# Altium PCB OBD.PcbDoc
Units mil, origin at the board's own origin, x right, y up, seen from the top; angles counter-clockwise.
Board outline 6000 x 4000 mil, 2 copper layers (Top Layer, Bottom Layer); 12 components, 0 nets, 112 pads, 6 vias.
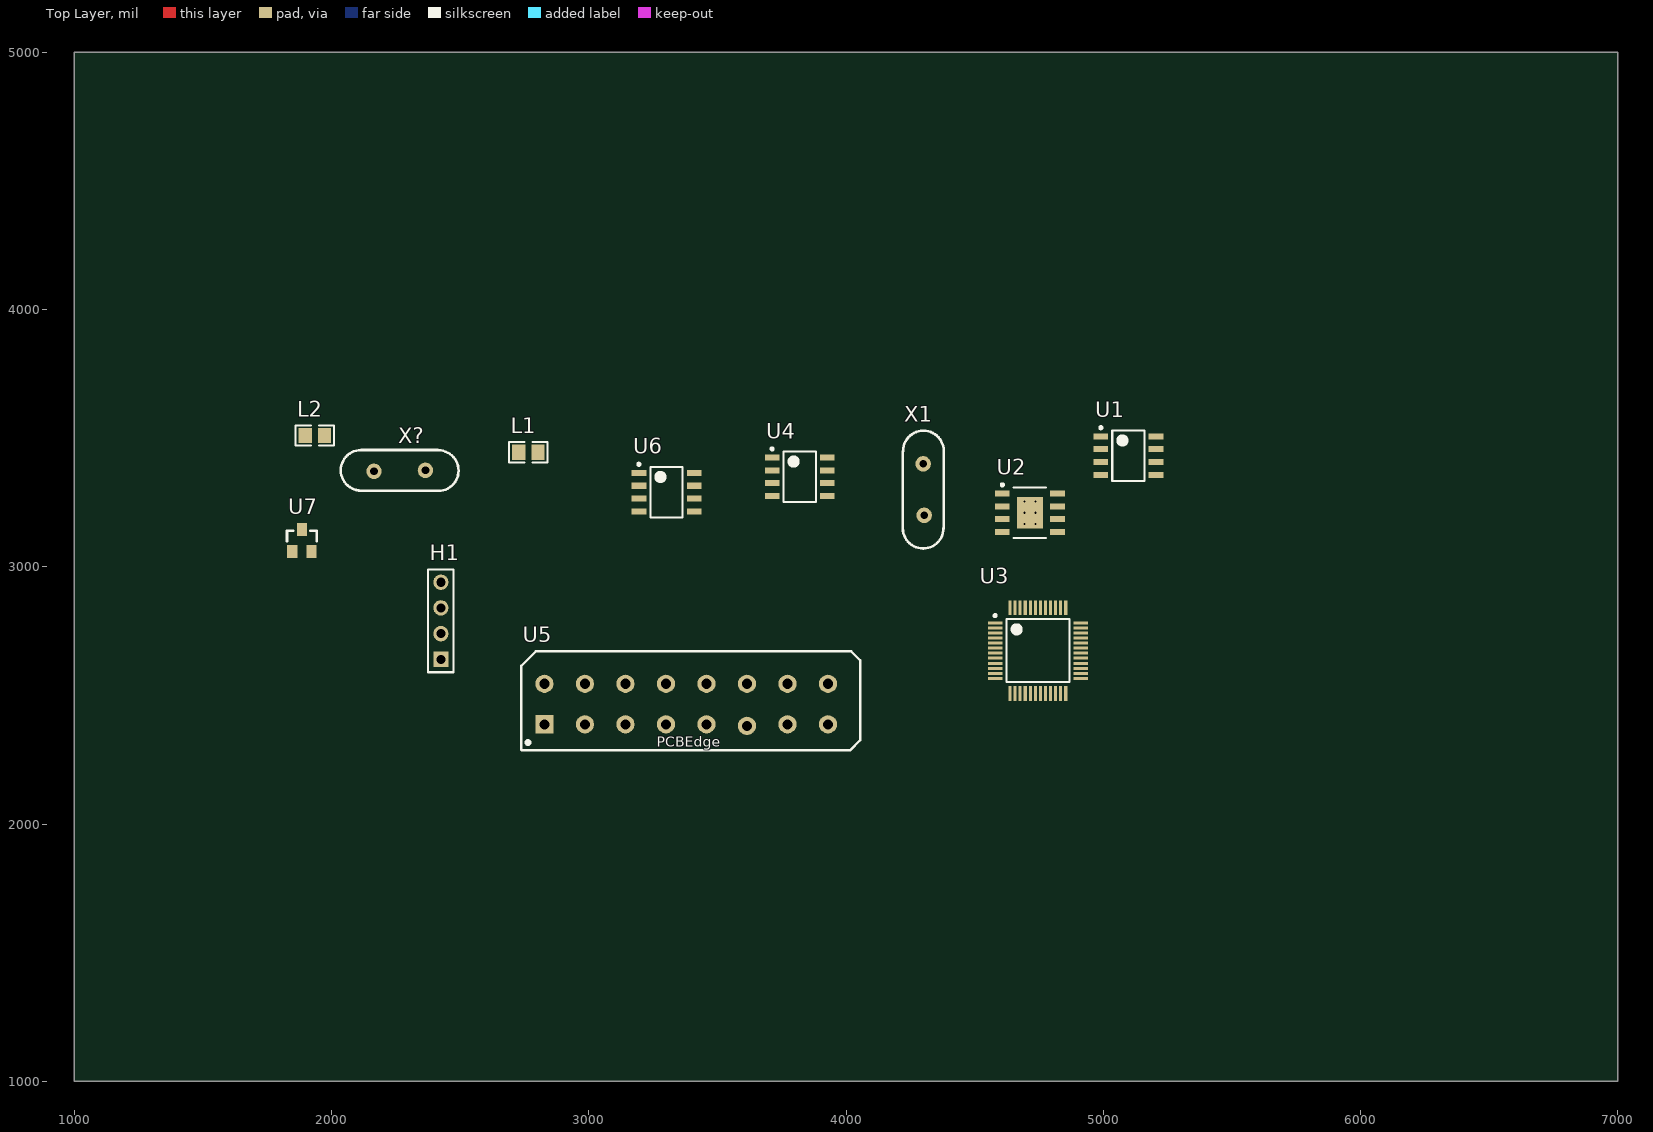
[diagram p0: Top Layer view]
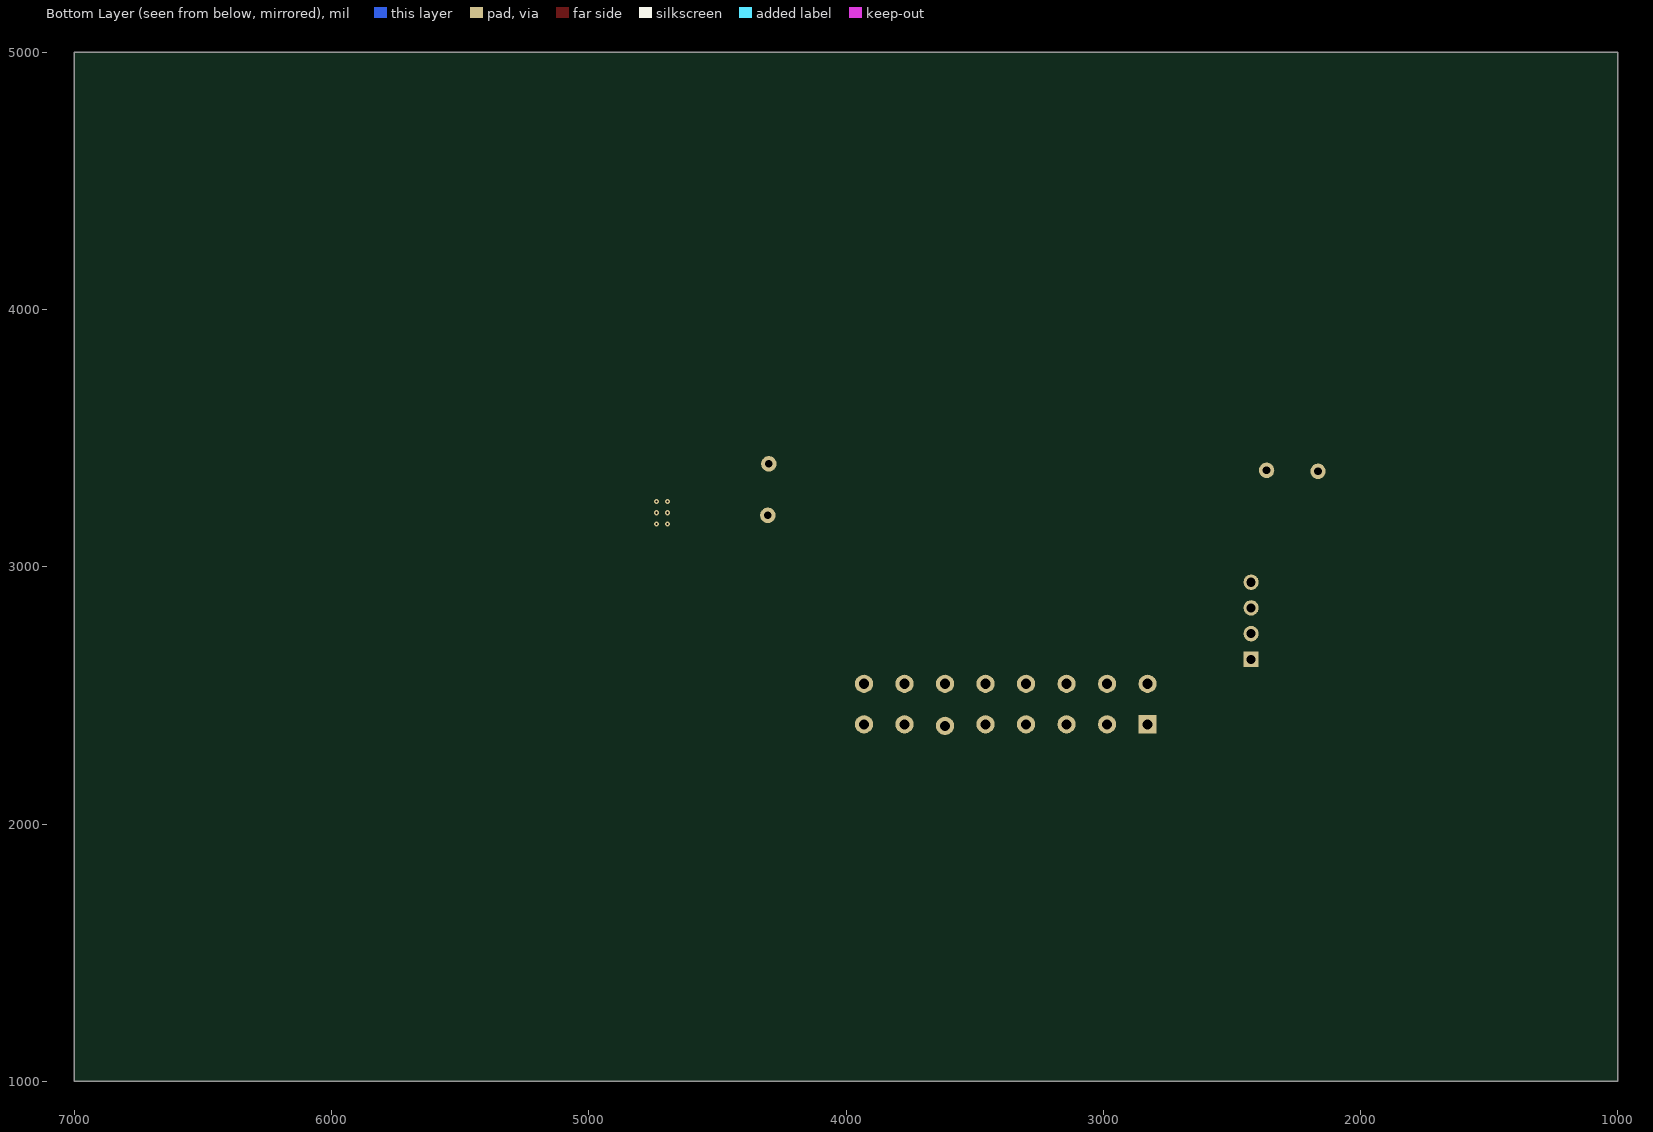
[diagram p1: Bottom Layer view, seen from below]

## Layer stack, top to bottom
Top Solder: solder mask 0.4, Solder Resist, Dk 3.5
Top Layer: signal copper 1.4
Dielectric 1: dielectric 12.6, FR-4, Dk 4.8
Bottom Layer: signal copper 1.4
Bottom Solder: solder mask 0.4, Solder Resist, Dk 3.5

## Board outline
1000,1000 7000,1000 7000,5000 1000,5000

## Design rules (kind name [scope] priority, off if disabled: settings)
Clearance [All] p1: gap=10
PolygonConnect [All] p1: connectstyle=Relief reliefconductorwidth=10 reliefentries=4 polygonreliefangle="90 Angle" airgapwidth=10
RoutingVias [All] p1: holewidth=28 width=50 viastyle="Through Hole" minholewidth=28 minwidth=50 maxholewidth=28 maxwidth=50
SolderMaskExpansion [All] p1: expansion=4
Width [All] p1: maxlimit=10 minlimit=10 preferedwidth=10
30 further rules are at their usual default settings.

## Components (designator, comment, footprint, x,y, rotation, side; value= is the part's Value field where it differs from the comment)
H1 "Download" DownLoad-H 2425,2640 r90 top
L1 "LED" 0805 2765,3445 r0 top
L2 "4.7uH" 0805 1935,3510 r0 top
U1 "TJF1051T / 3" TJF1051 5100,3425 r0 top
U2 "TPS5430" TPS5430 4715,3210 r0 top
U3 "LPC1549" LPC1549JBD48 4745,2670 r0 top
U4 "MC33660EFR2" SOP-8 3820,3350 r0 top
U5 "OBD-Connector" OBD-MaleConnector 2827.6,2387.52 r0 top
U6 "LM317L" LM317L 3303.28,3290 r0 top
U7 "IMP809TEUR-T" SOT23-3 1885,3145 r0 top
X1 "12MHZ" 12Mhz-DIP 4300,3400 r90 top
X? "12MHZ" 12Mhz-DIP 2365,3375 r0 top

## Footprints (in the part's own frame and the unit in brackets; to place one, negate y for a bottom-side part, rotate by r counter-clockwise, add the part's x,y. Pads: shape width x height; smd on the part's side, far side on the other; paste and mask are expansions set on the pad)
12Mhz-DIP [mil]
  round 60 hole 30: 1(0,0) 2(-200,-4)
  silkscreen extent -329,-80 129,79
0805 [mm]
  rect 1.3x1.5 smd: 1(-0.95,0) 2(0.95,0)
  silkscreen extent -1.9,-1 1.9,1
DownLoad-H [mm]
  rect 1.52x1.5 hole 0.9: 1(0,0)
  oval 1.52x1.5 hole 0.9: 2(2.54,0) 3(5.08,0) 4(7.62,0)
  silkscreen extent -1.27,-1.27 8.89,1.27
LM317L [mm]
  rect 1.45x0.6 smd: 1(-2.75,1.905) 2(-2.75,0.635) 3(-2.75,-0.635) 4(-2.75,-1.905) 5(2.7,-1.905) 6(2.7,-0.635) 7(2.7,0.635) 8(2.7,1.905)
  silkscreen extent -2.87,-2.5 1.57,2.88
LPC1549JBD48 [mm]
  rect 1.45x0.3 smd: 1(-4.2,2.852) 2(-4.2,2.352) 3(-4.2,1.852) 4(-4.2,1.352) 5(-4.2,0.852) 6(-4.2,0.352) 7(-4.2,-0.148) 8(-4.2,-0.648) 9(-4.2,-1.148) 10(-4.2,-1.648) 11(-4.2,-2.148) 12(-4.2,-2.648) 25(4.25,-2.648) 26(4.25,-2.148) 27(4.25,-1.648) 28(4.25,-1.148) 29(4.25,-0.648) 30(4.25,-0.148) 31(4.25,0.352) 32(4.25,0.852) 33(4.25,1.352) 34(4.25,1.852) 35(4.25,2.352) 36(4.25,2.852)
  rect 0.3x1.45 smd: 13(-2.725,-4.123) 14(-2.225,-4.123) 15(-1.725,-4.123) 16(-1.225,-4.123) 17(-0.725,-4.123) 18(-0.225,-4.123) 19(0.275,-4.123) 20(0.775,-4.123) 21(1.275,-4.123) 22(1.775,-4.123) 23(2.275,-4.123) 24(2.775,-4.123) 37(2.775,4.327) 38(2.275,4.327) 39(1.775,4.327) 40(1.275,4.327) 41(0.775,4.327) 42(0.275,4.327) 43(-0.225,4.327) 44(-0.725,4.327) 45(-1.225,4.327) 46(-1.725,4.327) 47(-2.225,4.327) 48(-2.725,4.327)
  silkscreen extent -4.32,-3 3.13,3.68
OBD-MaleConnector [mm]
  rect 1.8x1.8 hole 1: 1(0,0)
  round 1.8 hole 1: 2(4,0) 3(8,0) 4(12,0) 5(16,0) 6(20,-0.152) 7(24,0) 8(28,0) 9(0,4) 10(4,4) 11(8,4) 12(12,4) 13(16,4) 14(20,4) 15(24,4) 16(28,4)
  silkscreen extent -2.29,-2.57 31.17,7.21
SOP-8 [mm]
  rect 1.45x0.6 smd: 1(-2.725,1.905) 2(-2.725,0.635) 3(-2.725,-0.635) 4(-2.725,-1.905) 5(2.725,-1.905) 6(2.725,-0.635) 7(2.725,0.635) 8(2.725,1.905)
  silkscreen extent -2.85,-2.5 1.6,2.88
SOT23-3 [mil]
  rect 40x50 smd: 1(-37.99,-85) 2(37.01,-85) 3(0.01,0)
  silkscreen extent -58,-45 57,-5
TJF1051 [mm]
  rect 1.45x0.6 smd: 1(-2.776,2.083) 2(-2.776,0.813) 3(-2.776,-0.457) 4(-2.776,-1.727) 5(2.674,-1.727) 6(2.674,-0.457) 7(2.674,0.813) 8(2.674,2.083)
  silkscreen extent -2.9,-2.32 1.55,3.06
TPS5430 [mm]
  rect 1.45x0.6 smd: 1(-2.725,1.905) 2(-2.725,0.635) 3(-2.725,-0.635) 4(-2.725,-1.905) 5(2.725,-1.905) 6(2.725,-0.635) 7(2.725,0.635) 8(2.725,1.905)
  rect 2.6x3.1 smd: 9(0,0)
  silkscreen extent -2.85,-2.5 1.6,2.88

## Part data
H1: library part DownLoad-H
L2: library part Inductor
U3: library part LPC1549JBD48
U5: library part OBD-MaleHead
X1 X?: library part OSC

## Via types
v1: diameter 19.68, hole 7.87, Top Layer to Bottom Layer, 6 vias

## Nets (pads, with @x,y where several pads share a name; then routed paths per layer and width w, separated by ;. In a path a pad name is that pad's centre, name@x,y a point inside that pad or via, vN(x,y) a via of type N, cw(c..) or ccw(c..) an arc to the next point about the centre after c; other vN are vias at no path point)
pads on no net: H1.1 H1.2 H1.3 H1.4 L1.1 L1.2 L2.1 L2.2 U1.1 U1.2 U1.3 U1.4 U1.5 U1.6 U1.7 U1.8 U2.1 U2.2 U2.3 U2.4 U2.5 U2.6 U2.7 U2.8 U2.9 U3.1 U3.2 U3.3 U3.4 U3.5 U3.6 U3.7 U3.8 U3.9 U3.10 U3.11 U3.12 U3.13 U3.14 U3.15 U3.16 U3.17 U3.18 U3.19 U3.20 U3.21 U3.22 U3.23 U3.24 U3.25 U3.26 U3.27 U3.28 U3.29 U3.30 U3.31 U3.32 U3.33 U3.34 U3.35 U3.36 U3.37 U3.38 U3.39 U3.40 U3.41 U3.42 U3.43 U3.44 U3.45 U3.46 U3.47 U3.48 U4.1 U4.2 U4.3 U4.4 U4.5 U4.6 U4.7 U4.8 U5.1 U5.2 U5.3 U5.4 U5.5 U5.6 U5.7 U5.8 U5.9 U5.10 U5.11 U5.12 U5.13 U5.14 U5.15 U5.16 U6.1 U6.2 U6.3 U6.4 U6.5 U6.6 U6.7 U6.8 U7.1 U7.2 U7.3 X1.1 X1.2 X?.1 X?.2
copper on no net:
  other v1: 4693.35,3166.69 4736.65,3166.69 4693.35,3210 4736.65,3210 4693.35,3253.31 4736.65,3253.31

## Text inside footprints (layer, text, board x,y; h text height)
U5: Top Overlay "PCBEdge" at 3263.6,2300.52 h39.37